# Altium PCB bdcmc25_revised.PcbDoc (part 2 of 4)
Units mm, origin at the board's own origin, x right, y up, seen from the top; angles counter-clockwise.
Board outline 177.8 x 69.85 mm, 4 copper layers (Top Layer, Layer 2 (GND), Layer 3 (GND), Bottom Layer), stack 0.603 mm thick; 363 components, 158 nets, 1074 pads, 732 vias.
Unrouted connection lines stored in the file: 6.
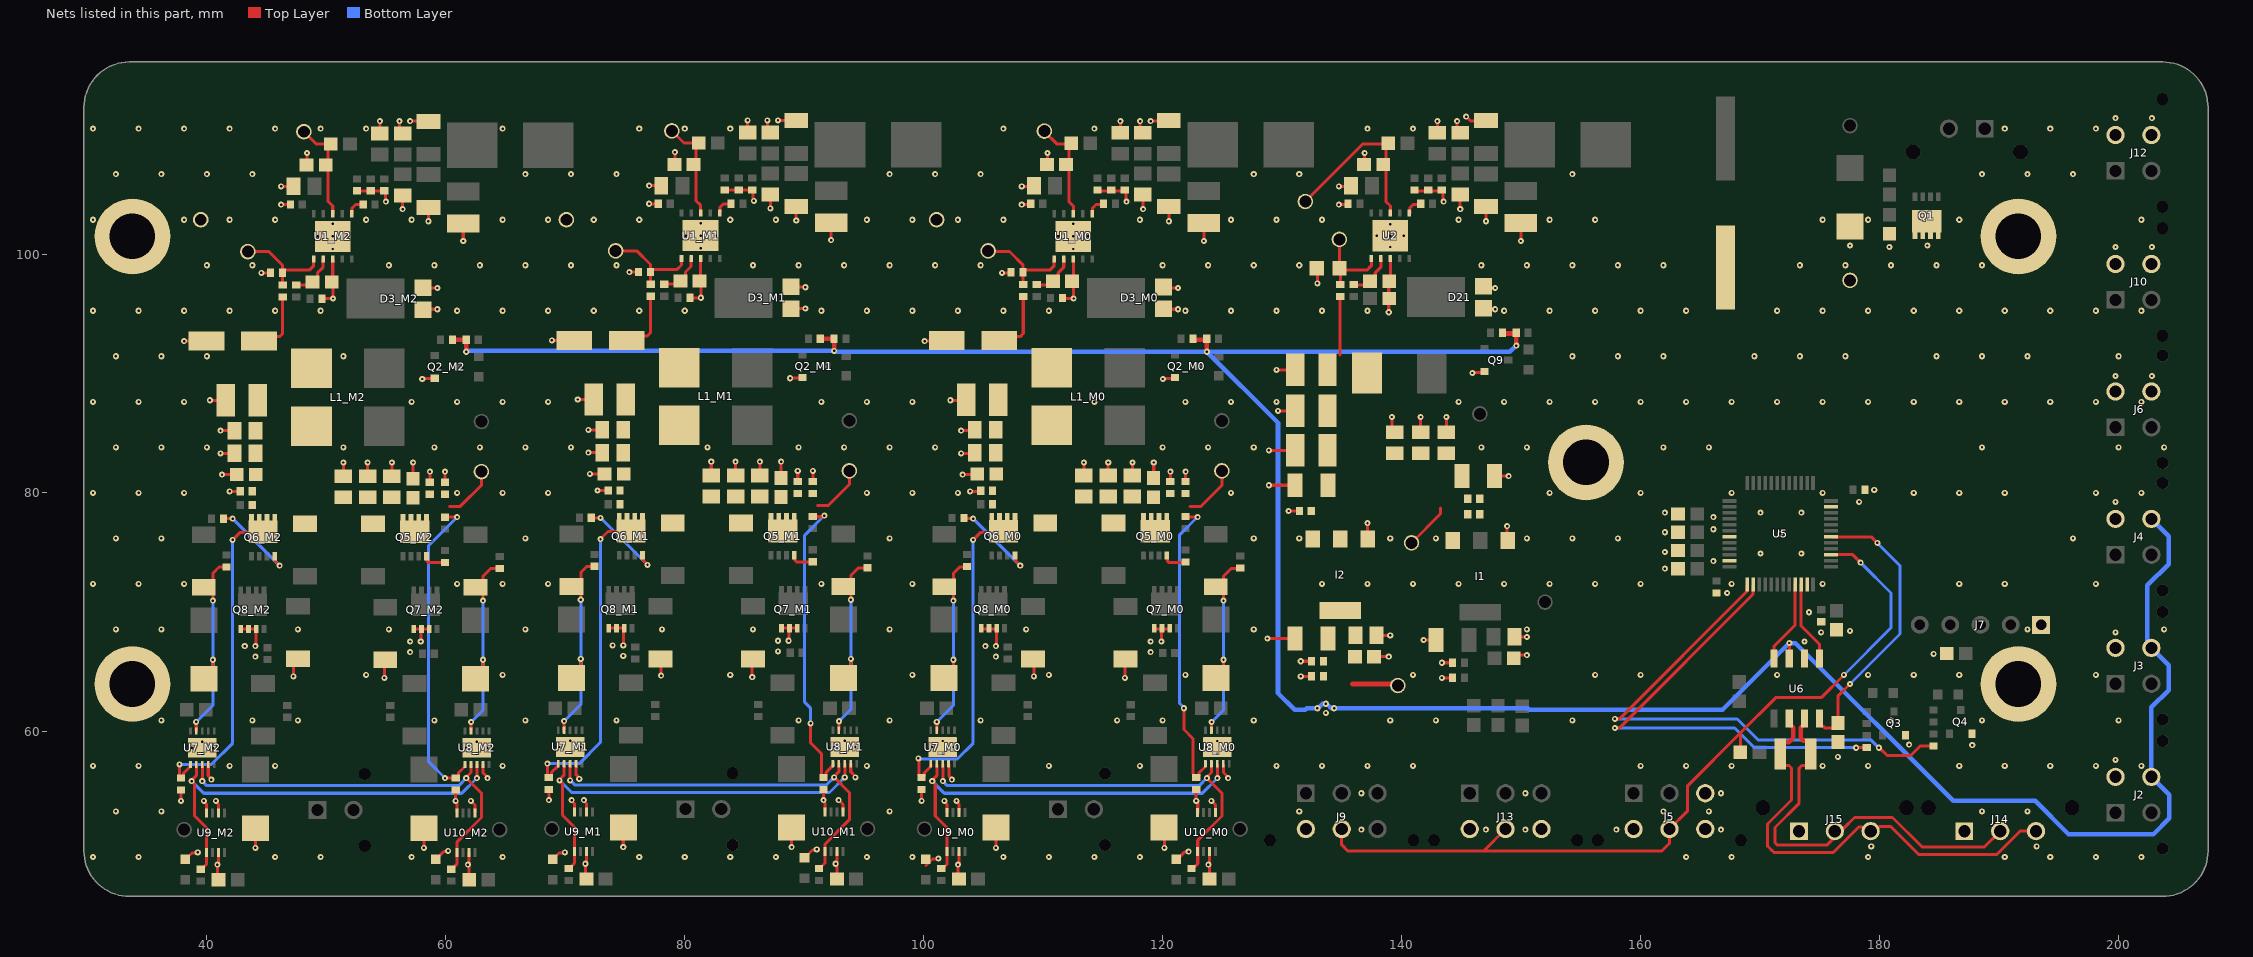
[diagram p4: the nets of this part, all layers, seen from the top]

## Part data
3V3 5V 7V 12V 12V 12V + + + - - - EN EN EN EN FB FB FB FB GND GND GND GND SW SW SW SW VBAT: library part TEST-POINT-0001, "Oranange PC Test Point, Miniature Phoisphor Bronze Silver Plating Through Hole Mounting Type"
C9_M0 C9_M1 C9_M2 C16_M0 C16_M1 C16_M2 C42 C45: library part CAP-10U-0002, "CAP CER 10UF 50V X7R 1210", Capacitance="10 uF", Voltage=50V, ComponentLink1Description=Datasheet, ComponentLink1URL=https://mm.digikey.com/Volume0/opasdata/d220001/medias/docus/41/CL32B106KBJNNNE_Spec.pdf, Device Class=Ceramic, Size=1210
C10_M0 C10_M1 C10_M2 C17_M0 C17_M1 C17_M2 C43 C46 C56_M0 C56_M1 C56_M2 C57_M0 C57_M1 C57_M2: library part CAP-1U-0001, "CAP CER 1UF 50V X7R 0805", Capacitance="1.0 uF", Voltage="50 V", ComponentLink2Description=Datasheet, ComponentLink2URL=https://www.yageo.com/upload/media/product/productsearch/datasheet/mlcc/UPY-GPHC_X7R_6.3V-to-250V_24.pdf, Device Class=Ceramic, Size=0805
C11_M0 C11_M1 C11_M2 C18_M0 C18_M1 C18_M2 C44 C47: library part CAP-0.1U-0002, "CAP CER 0.1UF 50V X7R 0805", Capacitance="100 nF", Voltage Rating="50 V", ComponentLink2Description=Datasheet, ComponentLink2URL=https://www.yageo.com/upload/media/product/productsearch/datasheet/mlcc/UPY-GPHC_X7R_6.3V-to-250V_24.pdf, Device Class=Ceramic, Size=0805
C12_M0 C12_M1 C12_M2 C19_M0 C19_M1 C19_M2 C66 C70: library part CAP-10N-0001, "CAP CER 10000PF 50V C0G/NP0 0805", Capacitance=10nF, Voltage=50V, ComponentLink1Description=Datasheet, ComponentLink1URL=https://search.murata.co.jp/Ceramy/image/img/A01X/G101/ENG/GRM2195C1H103JA01-01.pdf, Device Class=Ceramic, Size=0805
C13_M0 C13_M1 C13_M2 C21_M0 C21_M1 C21_M2 C68 C72: library part CAP-100P-0001, "CAP CER 100PF 50V C0G/NPO 0402", Capacitance="100 pF", Voltage=50V, ComponentLink1Description=Datasheet, ComponentLink1URL=https://www.yageo.com/upload/media/product/productsearch/datasheet/mlcc/UPY-GP_NP0_16V-to-50V_18.pdf, Device Class=Ceramic, Size=0402
C14_M0 C14_M1 C14_M2 C22_M0 C22_M1 C22_M2 C69 C73: library part CAP-10P-0001, "CAP CER 10PF 50V C0G/NPO 0402", Capacitance="10 pF", Voltage=50V, ComponentLink1Description=Datasheet, ComponentLink1URL=https://www.yageo.com/upload/media/product/productsearch/datasheet/mlcc/UPY-GP_NP0_16V-to-50V_18.pdf, Device Class=Ceramic, Size=0402
C15_M0 C15_M1 C15_M2 C20_M0 C20_M1 C20_M2 C62_M0 C62_M1 C62_M2 C63_M0 C63_M1 C63_M2 C67 C71: library part CAP-1N-0001, "CAP CER 1000PF 50V X7R 0402", Capacitance="1.0 nF", Voltage="50 V", ComponentLink2Description=Datasheet, ComponentLink2URL=http://www.yageo.com/documents/recent/UPY-GP_NP0_16V-to-50V_16.pdf, Device Class=Ceramic, Size=0402
C23_M0 C23_M1 C23_M2 C35 C36 C39 C40 C48 C49 C50 C74: library part CAP-0.1U-0001, "CAP CER 0.1UF 16V X7R 0402", Capacitance="100 nF", Voltage Rating="16 V", ComponentLink2Description=Datasheet, ComponentLink2URL=https://www.yageo.com/upload/media/product/productsearch/datasheet/mlcc/UPY-GPHC_X7R_6.3V-to-250V_24.pdf, Device Class=Ceramic, Size=0402
C24_M0 C24_M1 C24_M2 C25_M0 C25_M1 C25_M2 C75 C76: library part CAP-2.2U-0001, "CAP CER 2.2UF 100V X7R 1206", Capacitance=2.2uF, Voltage=100V, ComponentLink1Description=Datasheet, ComponentLink1URL=https://www.yageo.com/upload/media/product/productsearch/datasheet/mlcc/UPY-GPHC_X7R_6.3V-to-250V_24.pdf, Device Class=Ceramic, Size=1206
C26_M0 C26_M1 C26_M2: library part CAP-47U-0001, "CAP ALUM POLY 47UF 20% 16V SMD", Capacitance="47 uF", Voltage=16V, ComponentLink1Description=Datasheet, ComponentLink1URL=https://industrial.panasonic.com/cdbs/www-data/pdf/AAB8000/AAB8000C175.pdf, Device Class=Electrolytic
C27_M0 C27_M1 C27_M2 C79: library part CAP-2.7N-0001, "CAP CER 2700PF 50V C0G/NP0 0805", Capacitance=2.7nF, Voltage=50V, ComponentLink1Description=Datasheet, ComponentLink1URL=https://search.murata.co.jp/Ceramy/image/img/A01X/G101/ENG/GRM2165C1H272JA01-01.pdf, Device Class=Ceramic, Size=0805
C28_M0 C28_M1 C28_M2 C80: library part CAP-6.8P-0001, "CAP CER 6.8PF 100V C0G/NPO 0603", Capacitance=6.8pF, Voltage=100V, ComponentLink1Description=Datasheet, ComponentLink1URL=https://www.yageo.com/upload/media/product/productsearch/datasheet/mlcc/UPY-GPHC_X7R_6.3V-to-250V_24.pdf, Device Class=Ceramic, Size=0603
C29_M0 C29_M1 C29_M2: library part CAP-510P-0001, "CAP CER 510PF 50V C0G/NP0 0402", Capacitance="510 pF", Voltage="50 V", ComponentLink2Description=Datasheet, ComponentLink2URL=https://www.mouser.com/ProductDetail/Walsin/0402N511J500CT?qs=u16ybLDytRbq33ukPPRl4A%3D%3D&srsltid=AfmBOoq1-HCbTRqPV3GtwyI6lHLBf095DSA3Qg1Qkiix4a-obr82TmJ6, Device Class=Ceramic, Size=0402
C30 C31 C32 C33: library part CAP-10U-0004, "CAP TANT 10UF 10% 16V 1206", Capacitance="10 uF", Voltage=16V, ComponentLink1Description=Datasheet, ComponentLink1URL=https://www.lcsc.com/datasheet/lcsc_datasheet_2304140030_Vishay-Intertech-293D106X9016A2TE3_C110038.pdf, Device Class=Tantalum, Size=1206
C34 C38: library part CAP-10U-0001, "CAP CER 10UF 10V X5R 0603", Capacitance="10 uF", Voltage=10V, ComponentLink1Description=Datasheet, ComponentLink1URL=https://www.yageo.com/upload/media/product/app/datasheet/mlcc/upy-gphc_x5r_4v-to-50v.pdf, Device Class=Ceramic, Size=0603
C37 C41: library part CAP-470P-0001, "CAP CER 470PF 50V C0G/NPO 0805", Capacitance="470 pF", Voltage=50V, ComponentLink1Description=Datasheet, ComponentLink1URL=https://www.yageo.com/upload/media/product/productsearch/datasheet/mlcc/UPY-GP_NP0_16V-to-50V_18.pdf, Device Class=Ceramic, Size=0805
C51: library part CAP-4.7U-0001, "CAP CER 4.7UF 25V X5R 0603", Capacitance="4.7 uF", Voltage=25V, Device Class=Ceramic, Size=0603
C52 C54 C58_M0 C58_M1 C58_M2 C59_M0 C59_M1 C59_M2: library part CAP-10N-0002, "CAP CER 10000PF 50V X7R 0603", Capacitance="10 nF", Voltage="50 V", ComponentLink2Description=Datasheet, ComponentLink2URL=http://www.yageo.com/documents/recent/UPY-GPHC_X7R_6.3V-to-50V_18.pdf, Device Class=Ceramic, Size=0603
C53 C55: library part CAP-1U-0002, "CAP CER 1UF 16V X7R 0603", Capacitance="1.0 uF", Voltage=16V, Device Class=Ceramic, Size=0603
C60_M0 C60_M1 C60_M2 C61_M0 C61_M1 C61_M2 C64_M0 C64_M1 C64_M2 C65_M0 C65_M1 C65_M2 C82: library part CAP-100N-0001, "CAP CER 0.1UF 100V X7R 0603", Capacitance="100 nF", Voltage="100 V", ComponentLink1Description=Datasheet, ComponentLink1URL=https://www.yageo.com/upload/media/product/app/datasheet/mlcc/upy-np0x7r_mv_100-to-630v.pdf, Device Class=Ceramic, Size=0603
C77 C78: library part CAP-47U-0003, "CAP CER 47UF 16V X5R 1210", Capacitance="47 uF", Voltage=16V, ComponentLink1Description=Datasheet, ComponentLink1URL=https://search.murata.co.jp/Ceramy/image/img/A01X/G101/ENG/GRM32ER61C476KE15-01.pdf, Device Class=Ceramic, Size=1210
C81: library part CAP-3N-0001, "3000 pF ±5% 50V Ceramic Capacitor C0G, NP0 0603 (1608 Metric)", Capacitance="3 nF", Voltage=50V, ComponentLink1Description=Datasheet, ComponentLink1URL=https://mm.digikey.com/Volume0/opasdata/d220001/medias/docus/41/CL32B106KBJNNNE_Spec.pdf, Device Class=Ceramic, Size=1210
D1: library part DIO-TVS-0001, "TVS DIODE 40VWM 64.5VC DO214AA", Current Rating=9.3A, Voltage Rating=64.5V, ComponentLink1Description=Datasheet, ComponentLink1URL=https://www.littelfuse.com/media?resourcetype=datasheets&itemid=09a6ae9a-73cb-4ac4-acac-e6dab92ab953&filename=littelfuse_tvs_diode_smbj_datasheet.pdf
D2_M0 D2_M1 D2_M2 D4 D5 D18_M0 D18_M1 D18_M2 D19_M0 D19_M1 D19_M2 D20: library part LED-0001, "LED YELLOW CLEAR 0603 SMD", Forward Current=30mA, Forward Voltage=2V, ComponentLink1Description=Datasheet, ComponentLink1URL=https://www.americanbrightled.com/pdffiles/led-components/smt/BL-HKC36G-AV-TRB.pdf
D3_M0 D3_M1 D3_M2 D21: library part DIO-SCHOTTKY-0001, "DIODE SCHOTTKY 60V 7A POWERDI5", Forward Current=7A, Reverse Voltage (DC)=60V, ComponentLink1Description=Datasheet, ComponentLink1URL=https://www.diodes.com/assets/Datasheets/PDS760.pdf
D6_M0 D6_M1 D6_M2 D7_M0 D7_M1 D7_M2 D8_M0 D8_M1 D8_M2 D9_M0 D9_M1 D9_M2 D10_M0 D10_M1 D10_M2 D11_M0 D11_M1 D11_M2 D16_M0 D16_M1 D16_M2 D17_M0 D17_M1 D17_M2: library part DIO-SCHOTTKY-0003, "DIODE SCHOTTKY 60V 3A SOD128", Current Rating=3A, Reverse Voltage=60V, ComponentLink1Description=Datasheet, ComponentLink1URL=https://assets.nexperia.com/documents/data-sheet/PMEG6030EP.pdf
D12_M0 D12_M1 D12_M2 D13_M0 D13_M1 D13_M2 D14_M0 D14_M1 D14_M2 D15_M0 D15_M1 D15_M2: library part DIO-TVS-0002, "TVS DIODE 12VWM 19.9VC DO214AA", Current Rating=30.2A, Standoff Voltage=12V, ComponentLink1Description=Datasheet, ComponentLink1URL=https://www.littelfuse.com/media?resourcetype=datasheets&itemid=09a6ae9a-73cb-4ac4-acac-e6dab92ab953&filename=littelfuse_tvs_diode_smbj_datasheet.pdf
F1_M0 F1_M1 F1_M2 F5: library part FUSE-0001, "FUSE BLOK CARTRIDGE 125V 10A SMD", Fuse Current=8A, Voltage Rating=125V, ComponentLink2Description=Datasheet, ComponentLink2URL=https://www.littelfuse.com/~/media/electronics/datasheets/fuses/littelfuse_fuse_154_154t_154l_154tl_datasheet.pdf.pdf
F2 F3 F4: library part FUSE-0002, "FUSE BRD MT 250MA 32VAC 32VDC", Fuse Current=250mA, Voltage Rating=32V, ComponentLink2Description=Datasheet, ComponentLink2URL=https://www.littelfuse.com/media?resourcetype=datasheets&itemid=4a59f034-1cca-460e-a5ba-e1e66247c76d&filename=littelfuse_fuse_467_datasheet.pdf
I1: library part IC_LDO_3V3_0001, "IC REG LIN 3.3V 800MA SOT223-4", ComponentLink1Description="New link", ComponentLink1URL=https://www.ti.com/lit/ds/symlink/lm1117.pdf?HQS=dis-dk-null-digikeymode-dsf-pf-null-wwe&ts=1721700739746
I2: library part IC_LDO_5V_0001, "IC REG LINEAR 5V 800MA SOT223-4", ComponentLink1Description=Datasheet, ComponentLink1URL=https://www.ti.com/lit/ds/symlink/lm1117.pdf?HQS=dis-dk-null-digikeymode-dsf-pf-null-wwe&ts=1721700739746
J1: library part CONN-2POS-0002, "CONN HEADER VERT 2POS 3MM", ComponentLink1Description=Datasheet, ComponentLink1URL=https://www.molex.com/content/dam/molex/molex-dot-com/products/automated/en-us/salesdrawingpdf/436/43650/436500215_sd.pdf?inline
J2 J3 J4 J6 J10 J12: library part CONN-4POS-0002, "CONN HEADER VERT 4POS 3MM", ComponentLink1Description=Datasheet, ComponentLink1URL=https://www.molex.com/content/dam/molex/molex-dot-com/products/automated/en-us/salesdrawingpdf/430/43045/430450412_sd.pdf?inline
J5 J9 J13: library part CONN-6POS-0001, "CONN HEADER VERT 6POS 3MM", ComponentLink1Description=Datasheet, ComponentLink1URL=https://tools.molex.com/pdm_docs/ps/PS-43045.pdf
J7: "Header, 5-Pin", LatestRevisionDate=17-Jul-2002, LatestRevisionNote="Re-released for DXP Platform.", Publisher="Altium Limited"
J14 J15: library part "Micro-Fit Molex 3 Pin Vertical", Package=43650-0315, DeviceName=43650-0315, DeviceSetName=HEADER_POS3_?, GateName_1=G$1, LibraryName=con-molex-micro-fit-3_0_2, SymbolName_1=HEADER_POS3
J14_M0 J14_M1 J14_M2: library part CONN-2POS-0001, "CONN HEADER VERT 2POS", ComponentLink1Description=Datasheet, ComponentLink1URL=https://tools.molex.com/pdm_docs/ps/PS-43045.pdf
L1_M0 L1_M1 L1_M2: library part IND-15U-0002-NoJLC, "SMD MOLDING POWER CHOKE", Current Rating=6A, Inductance=15uH, ComponentLink1Description=Datasheet, ComponentLink1URL=https://www.digikey.com/en/products/detail/codaca/CSAD1010-150M/16633512?s=N4IgjCBcoBwAxVAYygMwIYBsDOBTANCAPZQDaIALHAExwDMEAuoQA4AuUIAymwE4CWAOwDmIAL6Ew1MAE5EIFJAw4CxMiGoy6AdmoUQhajGqa6BjTDp6zhywFY4c23UtOLFbVXPVtYK3e9dODsbdwA2OxgQZhB2Th4BEXFJTQhoBTQsPEISSHITS0do1g5Ibj4hUQkNOBhteTiygFVBfjYAeVQAWVx0bABXXlxzfs4AVoAJcwBbIU4wAMJp9AAPeYDq2hgo9MaQFrbOnr7B4cJRsoBBGbmyuwA6DcIAWmp5RT5%2B1VzyAMYxAFAA
L2: library part IND-8.2U-0001, "8.2 µH Shielded Molded Inductor 4 A 68mOhm Max Nonstandard", Current Rating=7.5A, Inductance=8.2uH, ComponentLink1Description=Datasheet, ComponentLink1URL=https://products.sumida.com/products/pdf/CDRH104.pdf
Q1: library part NMOS-60A-0001, "MOSFET N-CH 60V 12A/60A 8VSON", Continuous Current=60A, Voltage=60V, ComponentLink2Description=Datasheet, ComponentLink2URL=http://www.ti.com/lit/ds/symlink/csd18543q3a.pdf
Q2_M0 Q2_M1 Q2_M2 Q3 Q4 Q9: library part NMOS-200MA-0001, "MOSFET N-CH 60V 200MA SOT23", Continuous Current=200mA, Voltage=60V, ComponentLink1Description=Datasheet, ComponentLink1URL=https://toshiba.semicon-storage.com/info/T2N7002AK_datasheet_en_20150401.pdf?did=29712&prodName=T2N7002AK
Q5_M0 Q5_M1 Q5_M2 Q6_M0 Q6_M1 Q6_M2 Q7_M0 Q7_M1 Q7_M2 Q8_M0 Q8_M1 Q8_M2: library part NMOS-26A-0001, "MOSFET N-CH 30V 60A 8VSON", Continuous Current=60A, Voltage=30V, ComponentLink1Description=Datasheet, ComponentLink1URL=https://www.ti.com/lit/ds/symlink/csd17575q3.pdf?ts=1728565072242&ref_url=https%253A%252F%252Fwww.mouser.co.uk%252F
R1: library part RES-200k-0001, "RES SMD 200K OHM 1% 1/10W 0603", Power=100mW, Resistance=200k, Tolerance=1%, ComponentLink1Description=Datasheet, ComponentLink1URL=https://www.yageo.com/upload/media/product/products/datasheet/rchip/PYu-RC_Group_51_RoHS_L_12.pdf, Size=0603
R2 R6_M0 R6_M1 R6_M2 R34: library part RES-100k-0001, "RES SMD 100K OHM 1% 1/10W 0603", Power=100mW, Resistance=100k, Tolerance=1%, ComponentLink1Description=Datasheet, ComponentLink1URL=https://www.yageo.com/upload/media/product/products/datasheet/rchip/PYu-RC_Group_51_RoHS_L_12.pdf, Size=0603
R3_M0 R3_M1 R3_M2 R11: library part RES-240-0001, "240R 0.063W 1% 0402 (1005 Metric)  SMD", Power=1/16W, Resistance=240R, Tolerance=1%, ComponentLink1Description=Datasheet, ComponentLink1URL=https://www.yageo.com/upload/media/product/products/datasheet/rchip/PYu-RC_Group_51_RoHS_L_12.pdf, Size=0402
R4_M0 R4_M1 R4_M2 R12: library part RES-2.15M-0001, "RES SMD 2.15M OHM 1% 1/10W 0603", Power=1/10W, Resistance=2.15M, Tolerance=1%, ComponentLink1Description=Datasheet, ComponentLink1URL=https://www.yageo.com/upload/media/product/products/datasheet/rchip/PYu-RC_Group_51_RoHS_L_12.pdf, Size=0603
R5_M0 R5_M1 R5_M2 R13: library part RES-1k-0001, "RES 1K OHM 1% 1/16W 0402", Power=1/16W, Resistance=1k, Tolerance=1%, ComponentLink1Description=Datasheet, ComponentLink1URL=https://www.yageo.com/upload/media/product/products/datasheet/rchip/PYu-RC_Group_51_RoHS_L_12.pdf, Size=0402
R7_M0 R7_M1 R7_M2: library part RES-147k-0001, "RES 147K OHM 1% 1/16W 0402", Power=1/16W, Resistance=147k, Tolerance=1%, ComponentLink1Description=Datasheet, ComponentLink1URL=https://www.yageo.com/upload/media/product/products/datasheet/rchip/PYu-RC_Group_51_RoHS_L_12.pdf, Size=0402
R8_M0 R8_M1 R8_M2: library part RES-59k-0001, "RES 59K OHM 1% 1/16W 0402", Power=1/16W, Resistance=59k, Tolerance=1%, ComponentLink1Description=Datasheet, ComponentLink1URL=https://www.digikey.com/en/products/detail/yageo/RC0402FR-0759KL/2827634?s=N4IgTCBcDaIEoGEAMAWJYBicC0SDsArAJwDSAMiALoC%2BQA, Size=0402
R9_M0 R9_M1 R9_M2 R37: library part RES-178k-0001, "62.5mW Thick Film Resistors 50V ±100ppm/℃ ±1% 178kΩ 0402 Chip Resistor - Surface Mount ROHS", Power=1/16W, Resistance=178k, Tolerance=1%, ComponentLink1Description=Datasheet, ComponentLink1URL=https://www.lcsc.com/datasheet/lcsc_datasheet_2304140030_RALEC-RTT021783FTH_C102842.pdf, Size=0402
R10_M0 R10_M1 R10_M2: library part RES-10.5k-0001, "RES 10.5K OHM 1% 1/16W 0402", Power=1/16W, Resistance=10.5k, Tolerance=1%, ComponentLink1Description=Datasheet, ComponentLink1URL=https://www.yageo.com/upload/media/product/products/datasheet/rchip/PYu-RC_Group_51_RoHS_L_12.pdf, Size=0402
R14 R15 R20: library part RES-4.7k-0001, "RES 4.7K OHM 1% 1/10W 0603", Power=1/10W, Resistance=4.7k, Tolerance=1%, ComponentLink1Description=Datasheet, ComponentLink1URL=https://www.yageo.com/upload/media/product/products/datasheet/rchip/PYu-RC_Group_51_RoHS_L_12.pdf, Size=0603
R16 R17: library part RES-470-0001, "RES 470 OHM 1% 1/16W 0402", Power=1/16W, Resistance=470R, Tolerance=1%, ComponentLink1Description=Datasheet, ComponentLink1URL=https://www.yageo.com/upload/media/product/products/datasheet/rchip/PYu-RC_Group_51_RoHS_L_12.pdf, Size=0402
R18 R19 R32_M0 R32_M1 R32_M2 R33_M0 R33_M1 R33_M2: library part RES-100-0001, "RES 100 OHM 1% 1/16W 0402", Power=1/16W, Resistance=100R, Tolerance=1%, ComponentLink1Description=Datasheet, ComponentLink1URL=https://www.yageo.com/upload/media/product/products/datasheet/rchip/PYu-RC_Group_51_RoHS_L_12.pdf, Size=0402
R21: library part RES-120-0001, "RES 120 OHM 1% 1/2W 1210", Power=1/2W, Resistance=120R, Tolerance=1%, ComponentLink1Description=Datasheet, ComponentLink1URL=https://www.yageo.com/upload/media/product/products/datasheet/rchip/PYu-RC_Group_51_RoHS_L_12.pdf, Size=1210
R22_M0 R22_M1 R22_M2 R23_M0 R23_M1 R23_M2 R24_M0 R24_M1 R24_M2 R25_M0 R25_M1 R25_M2 R28_M0 R28_M1 R28_M2 R29_M0 R29_M1 R29_M2 R30_M0 R30_M1 R30_M2 R31_M0 R31_M1 R31_M2: library part RES-33-0001, "RES 33 OHM 1% 1/8W 0402", Power=1/8W, Resistance=33R, Tolerance=1%, ComponentLink1Description=Datasheet, ComponentLink1URL=https://www.yageo.com/upload/media/product/products/datasheet/rchip/PYu-RC_Group_51_RoHS_L_12.pdf, Size=0402
R26_M0 R26_M1 R26_M2 R27_M0 R27_M1 R27_M2: library part RES-1-0001, "RES SMD 1 OHM 5% 1/10W 0402", Power=1/10W, Resistance=1.0R, Tolerance=5%, ComponentLink1Description=Datasheet, ComponentLink1URL=https://api.pim.na.industrial.panasonic.com/file_stream/main/fileversion/1242, Size=0402
R35: library part RES-80.6k-0001, "80.6 kOhms ±1% 0.063W, 1/16W Chip Resistor 0402 (1005 Metric) Moisture Resistant Thick Film", Power=1/16W, Resistance=80.6k, Tolerance=1%, ComponentLink1Description=Datasheet, ComponentLink1URL=https://www.yageo.com/upload/media/product/products/datasheet/rchip/PYu-RC_Group_51_RoHS_L_12.pdf, Size=0402
R36: library part RES-36.5k-0001, "36.5 kOhms ±1% 0.063W, 1/16W Chip Resistor 0402 (1005 Metric) Moisture Resistant Thick Film", Power=1/16W, Resistance=36.5k
R38: library part RES-10.4k-0001, "10.4 kOhms ±0.1% 0.125W, 1/8W Chip Resistor 0805 (2012 Metric) Thin Film", Power=1/8W, Resistance=10.4k, Tolerance=1%, ComponentLink1Description=Datasheet, ComponentLink1URL=https://www.yageo.com/upload/media/product/products/datasheet/rchip/PYu-RC_Group_51_RoHS_L_12.pdf, Size=0402
U1_M0 U1_M1 U1_M2 U2: library part IC-BUCK-0001, "IC REG BUCK ADJ 5A 10WSON", ComponentLink1Description=Datasheet, ComponentLink1URL=https://www.ti.com/general/docs/suppproductinfo.tsp?distId=10&gotoUrl=https%3A%2F%2Fwww.ti.com%2Flit%2Fgpn%2Ftps54561
U5: library part IC-STM32G431CBT6, "IC MCU 32BIT 128KB FLASH 48LQFP", Package=48LQFP, ComponentLink1Description=Datasheet, ComponentLink1URL=https://www.st.com/resource/en/datasheet/stm32g431cb.pdf
U6: library part IC-CAN-0001, "IC TRANSCEIVER 1/1 8SOIC", ComponentLink1Description=Datasheet, ComponentLink1URL=https://www.ti.com/lit/ds/symlink/tcan1044-q1.pdf?HQS=dis-dk-null-digikeymode-dsf-pf-null-wwe&ts=1728758303289&ref_url=https%253A%252F%252Fwww.ti.com%252Fgeneral%252Fdocs%252Fsuppproductinfo.tsp%253FdistId%253D10%2526gotoUrl%253Dhttps%253A%252F%252Fwww.ti.com%252Flit%252Fgpn%252Ftcan1044-q1
U7_M0 U7_M1 U7_M2 U8_M0 U8_M1 U8_M2: library part IC-GTDR-0001, "IC GATE DRVR HALF-BRIDGE 10VSON", Package=10-VSON, ComponentLink1Description=Datasheet, ComponentLink1URL=https://www.ti.com/lit/ds/symlink/ucc27282.pdf?HQS=dis-dk-null-digikeymode-dsf-pf-null-wwe&ts=1728563165008&ref_url=https%253A%252F%252Fwww.ti.com, VCC Max=16
U9_M0 U9_M1 U9_M2 U10_M0 U10_M1 U10_M2: library part IC-MUX-0001, "Multiplexer 1 x 2:1 8-VSSOP", ComponentLink1Description=Datasheet, ComponentLink1URL=https://www.ti.com/general/docs/suppproductinfo.tsp?distId=10&gotoUrl=https%3A%2F%2Fwww.ti.com%2Flit%2Fgpn%2Fsn74lvc2g157

## Free pads (board coordinates)
  round 6.35 hole 3.81: ""(33.782,64.008) ""(33.782,101.473) ""(155.448,82.55) ""(191.643,64.008) ""(191.643,101.473)

## Via types
v1: diameter 0.508, hole 0.203, Top Layer to Bottom Layer, 717 vias
v2: diameter 0.508, hole 0.2, Top Layer to Bottom Layer, 15 vias

## Nets (pads, with @x,y where several pads share a name; then routed paths per layer and width w, separated by ;. In a path a pad name is that pad's centre, name@x,y a point inside that pad or via, vN(x,y) a via of type N, cw(c..) or ccw(c..) an arc to the next point about the centre after c; other vN are vias at no path point)
3V3: 
5V: 5V.1 C33.2 C34.2 C35.2 C36.2 C37.2 I2.2 I2.4 J2.4 J3.4 J4.4 R3_M0.2 R3_M1.2 R3_M2.2 R5_M0.2 R5_M1.2 R5_M2.2 R11.2 R13.2 U6.3 | length 246.5
  Top Layer w0.254: U6.3@172.466,66.127 v1(172.466,67.437)
  Top Layer w0.381: R5_M2.2@60.563,92.837 R3_M2.2@61.722,92.837 v1(61.722,91.821) ; R5_M1.2@91.356,92.902 R3_M1.2@92.515,92.902 v1(92.515,91.886) ; R5_M0.2@122.552,92.837 123.711,92.837 v1(123.711,91.821) ; 135.89,64.008 139.573,64.008 5V.1@139.7,63.881 ; R13.2@148.46,93.345 149.619,93.345 v1(149.619,92.329)
  Bottom Layer w0.381: v1(61.722,91.821) 61.756,91.821 61.821,91.886 v1(92.515,91.886) 92.55,91.886 92.615,91.821 v1(123.711,91.821) ; v1(149.619,92.329) 149.584,92.329 149.076,91.821 v1(123.711,91.821) ; J4.4@202.771,77.827 204.216,76.382 204.216,74.041 202.438,72.263 202.438,67.676 202.771,67.343 J3.4@202.771,67.032 204.216,65.587 204.216,63.5 202.771,62.055 202.771,61.436 202.761,61.426 202.761,58.843 202.771,58.833 J2.4@202.771,56.237 204.271,54.737 204.271,52.76 202.946,51.435 195.834,51.435 193.04,54.229 186.182,54.229 172.974,67.437 v1(172.466,67.437) 166.878,61.849 150.689,61.849 150.562,61.976 v1(134.366,61.976) 134.361,61.981 134.114,61.981 133.805,62.289 133.769,62.289 133.702,62.357 v1(133.667,62.357) 133.643,62.333 133.36,62.333 133.003,61.976 132.077,61.976 131.95,61.849 131.064,61.849 129.667,63.246 129.667,85.865 v1(123.711,91.821)
  other v1: 133.667,61.595 132.969,61.976
7V_Buck: 7V.1 C30.2 C32.2 C45.2 C46.2 C47.2 C70.2 C71.2 C72.2 C73.2 C77.2 C78.2 I1.3 I2.3 L2.2 R35.1 | length 8.8
  Top Layer w0.254: 134.874,91.567 R35.1@134.874,96.457 ; 7V.1@140.843,75.819 143.256,78.232 143.256,78.74
12V_MOTOR_M0: 12V.1@124.968,81.844 C16_M0.2 C17_M0.2 C18_M0.2 C19_M0.2 C20_M0.2 C21_M0.2 C22_M0.2 C26_M0.2 C56_M0.2 C57_M0.1 C58_M0.2 C59_M0.1 C62_M0.2 C63_M0.2 D8_M0.2 D9_M0.2 L1_M0.2 Q5_M0.3 Q6_M0.3 R7_M0.2 R26_M0.2 R27_M0.2 U7_M0.6 U8_M0.6 | length 63.6
  Top Layer w0.254: v1(99.568,57.785) 99.617,57.736 99.617,56.355 99.846,56.126 99.885,56.126 100.058,56.299 100.058,56.553 100.613,57.108 U7_M0.6@100.613,57.274 ; v1(104.153,76.073) 104.788,76.708 106.66,76.708 Q6_M0.3@106.7,76.748 ; C26_M0.2@106.353,92.71 106.729,93.086 108.085,93.086 108.344,93.345 R7_M0.2@108.344,96.401 ; v1(121.793,61.976) 121.793,60.198 122.555,59.436 122.555,56.504 122.586,56.473 122.586,56.355 122.759,56.182 C63_M0.2@122.809,56.182 ; R26_M0.2@121.92,78.026 121.944,78.002 122.912,78.002 v1(122.936,77.978) ; 122.314,78.881 123.217,78.881 124.981,80.645 12V.1@124.981,81.788 ; C63_M0.2@122.872,56.126 123.045,56.299 123.045,56.553 123.6,57.108 U8_M0.6@123.6,57.274
  Bottom Layer w0.254: v1(99.568,57.785) 99.608,57.745 102.843,57.745 104.153,59.055 v1(104.153,76.073) ; v1(121.793,61.976) 121.793,62.045 121.412,62.426 121.412,76.454 v1(122.936,77.978)
12V_MOTOR_M1: 12V.1@93.785,81.853 C16_M1.2 C17_M1.2 C18_M1.2 C19_M1.2 C20_M1.2 C21_M1.2 C22_M1.2 C26_M1.2 C56_M1.2 C57_M1.1 C58_M1.2 C59_M1.1 C62_M1.2 C63_M1.2 D8_M1.2 D9_M1.2 L1_M1.2 Q5_M1.3 Q6_M1.3 R7_M1.2 R26_M1.2 R27_M1.2 U7_M1.6 U8_M1.6 | length 63.4
  Top Layer w0.254: v1(68.512,57.342) 68.512,56.318 C62_M1.2@68.639,56.191 68.689,56.191 68.862,56.364 68.862,56.618 69.417,57.173 U7_M1.6@69.417,57.339 ; v1(72.957,76.138) 73.592,76.773 75.464,76.773 Q6_M1.3@75.504,76.813 ; C26_M1.2@75.157,92.775 75.533,93.151 76.889,93.151 77.148,93.41 R7_M1.2@77.148,96.466 ; v1(90.551,60.706) 90.551,59.073 91.44,58.184 91.44,56.364 91.613,56.191 91.676,56.191 91.849,56.364 91.849,56.618 92.404,57.173 U8_M1.6@92.404,57.339 ; R26_M1.2@90.737,78.035 90.766,78.007 91.527,78.007 91.625,78.105 v1(91.694,78.105) ; 91.118,78.946 92.021,78.946 93.785,80.71 12V.1@93.785,81.853
  Bottom Layer w0.254: v1(68.512,57.342) 71.179,57.342 72.957,59.12 v1(72.957,76.138) ; v1(90.551,60.706) 90.551,61.976 90.043,62.484 90.043,76.454 v1(91.694,78.105)
12V_MOTOR_M2: 12V.1@62.992,81.788 C16_M2.2 C17_M2.2 C18_M2.2 C19_M2.2 C20_M2.2 C21_M2.2 C22_M2.2 C26_M2.2 C56_M2.2 C57_M2.1 C58_M2.2 C59_M2.1 C62_M2.2 C63_M2.2 D8_M2.2 D9_M2.2 L1_M2.2 Q5_M2.3 Q6_M2.3 R7_M2.2 R26_M2.2 R27_M2.2 U7_M2.6 U8_M2.6 | length 64.4
  Top Layer w0.254: v1(37.719,57.277) 37.719,56.253 C62_M2.2@37.846,56.126 37.896,56.126 38.069,56.299 38.069,56.553 38.624,57.108 U7_M2.6@38.624,57.274 ; v1(42.164,76.073) 42.799,76.708 44.671,76.708 Q6_M2.3@44.711,76.748 ; C26_M2.2@44.364,92.71 44.74,93.086 46.096,93.086 46.355,93.345 R7_M2.2@46.355,96.401 ; v1(59.944,56.134) 59.948,56.13 60.829,56.13 C63_M2.2@60.833,56.126 60.883,56.126 61.056,56.299 61.056,56.553 61.611,57.108 U8_M2.6@61.611,57.274 ; R26_M2.2@59.944,77.97 59.948,77.974 60.956,77.974 v1(60.96,77.978) ; 60.325,78.881 61.228,78.881 62.992,80.645 12V.1@62.992,81.788
  Bottom Layer w0.254: v1(37.719,57.277) 40.386,57.277 42.164,59.055 v1(42.164,76.073) ; v1(59.944,56.134) 58.547,57.531 58.547,75.565 v1(60.96,77.978)
BOOT_2: C74.1 U2.1 | length 1.5
  Top Layer w0.254: U2.1@140.678,103.373 140.701,103.396 140.701,103.858 140.983,104.14 C74.1@141.626,104.14
BOOT_M0: C23_M0.1 U1_M0.1 | length 1.5
  Top Layer w0.254: U1_M0.1@114.135,103.373 114.158,103.396 114.158,103.858 114.44,104.14 C23_M0.1@115.083,104.14
BOOT_M1: C23_M1.1 U1_M1.1 | length 1.5
  Top Layer w0.254: U1_M1.1@82.939,103.438 82.962,103.461 82.962,103.923 83.244,104.205 C23_M1.1@83.887,104.205
BOOT_M2: C23_M2.1 U1_M2.1 | length 1.5
  Top Layer w0.254: U1_M2.1@52.146,103.373 52.169,103.396 52.169,103.858 52.451,104.14 C23_M2.1@53.094,104.14
CAN_N: J14.P$3 J15.P$3 R21.2 U6.6 | length 38.7
  Top Layer w0.254: R21.2@171.699,58.166 171.699,57.475 171.984,57.191 172.433,57.191 172.656,56.967 172.656,54.292 170.815,52.451 170.629,52.265 170.629,50.469 170.815,50.283 171.001,50.097 171.187,49.911 176.149,49.911 178.279,52.041 178.579,52.041 178.931,51.689 179.621,51.689 180.002,52.07 180.975,52.07 183.134,49.911 183.32,49.725 189.806,49.725 191.77,51.689 J14.P$3@193.119,51.689
  Top Layer w0.381: R21.2@171.699,58.166 171.699,58.857 171.984,59.141 172.433,59.141 172.784,59.492 172.784,60.359 172.466,60.677 U6.6@172.466,61.127
CAN_P: J14.P$2 J15.P$2 R21.1 U6.7 | length 34.3
  Top Layer w0.254: R21.1@174.249,58.166 174.249,57.475 173.965,57.191 173.515,57.191 173.291,56.968 173.291,54.029 171.264,52.002 171.264,50.732 171.45,50.546 175.641,50.546 176.056,50.961 176.056,51.469 176.52,51.933 177.028,51.933 177.927,52.832 181.111,52.832 183.583,50.36 188.79,50.36 J14.P$2@190.119,51.689
  Top Layer w0.381: U6.7@173.736,61.127 173.736,60.677 173.418,60.359 173.418,59.491 173.642,59.268 173.965,59.268 174.249,58.984 R21.1@174.249,58.166
CAN_RX_LED: R17.2 U5.25 | length 44.3
  Top Layer w0.254: v1(157.861,61.087) 157.885,61.111 158.266,61.111 168.929,71.774 168.929,72.306 U5.25@168.954,72.331 ; v1(179.959,58.674) 180,58.674 180.635,58.039 182.644,58.039 183.41,58.805 184.527,58.805 R17.2@184.531,58.809
  Bottom Layer w0.254: v1(157.861,61.087) 168.106,61.087 169.884,59.309 179.324,59.309 v1(179.959,58.674)
CAN_STB: R20.1 U5.42 U6.8 | length 24.4
  Top Layer w0.254: U6.8@175.006,61.127 175.006,60.677 175.179,60.504 175.254,60.504 175.433,60.325 176.111,60.325 R20.1@176.53,60.744 176.53,62.992 v1(177.546,64.008) ; U5.42@175.956,76.329 U5.42@175.954,76.331 179.32,76.331 v1(179.832,75.819)
  Bottom Layer w0.254: v1(177.546,64.008) 181.737,68.199 181.737,73.914 v1(179.832,75.819)
CAN_TX_LED: R16.2 U5.26 | length 38.8
  Top Layer w0.254: v1(157.861,60.325) 157.89,60.354 158.271,60.354 169.429,71.512 169.429,72.306 U5.26@169.454,72.331 ; v1(178.054,58.674) 178.058,58.678 178.939,58.678 R16.2@178.943,58.682
  Bottom Layer w0.254: v1(157.861,60.325) 167.894,60.325 169.545,58.674 v1(178.054,58.674)
COMP_2: C80.2 R36.2 U2.7 | length 3.7
  Top Layer w0.254: R36.2@136.03,97.401 136.038,97.409 137.135,97.409 137.389,97.663 137.808,98.082 137.808,98.425 138.278,98.895 U2.7@138.278,99.573
COMP_M0: C28_M0.2 R8_M0.2 U1_M0.7 | length 3.7
  Top Layer w0.254: R8_M0.2@109.487,97.401 109.495,97.409 110.592,97.409 110.846,97.663 111.265,98.082 111.265,98.425 111.735,98.895 U1_M0.7@111.735,99.573
COMP_M1: C28_M1.2 R8_M1.2 U1_M1.7 | length 3.7
  Top Layer w0.254: R8_M1.2@78.291,97.466 78.299,97.474 79.396,97.474 C28_M1.2@79.65,97.728 80.069,98.147 80.069,98.49 80.539,98.96 U1_M1.7@80.539,99.638
COMP_M2: C28_M2.2 R8_M2.2 U1_M2.7 | length 3.7
  Top Layer w0.254: R8_M2.2@47.498,97.401 47.506,97.409 48.603,97.409 C28_M2.2@48.857,97.663 49.276,98.082 49.276,98.425 49.746,98.895 U1_M2.7@49.746,99.573
DIR_1_IN_M0: R32_M0.1 U7_M0.7 U8_M0.8 U9_M0.5 | length 35.6
  Top Layer w0.254: U7_M0.7@101.113,57.274 101.113,56.338 100.724,55.949 v1(100.724,55.88) 100.724,55.858 100.978,55.604 100.978,52.959 101.98,51.957 101.98,49.915 101.978,49.913 101.978,48.948 101.536,48.506 R32_M0.1@101.486,48.506 ; v1(124.6,56.134) U8_M0.8@124.6,57.274
  Bottom Layer w0.254: v1(100.724,55.88) 101.74,54.864 123.33,54.864 v1(124.6,56.134)
DIR_1_IN_M1: R32_M1.1 U7_M1.7 U8_M1.8 U9_M1.5 | length 35.6
  Top Layer w0.254: U7_M1.7@69.917,57.339 69.917,56.403 69.528,56.014 v1(69.528,55.945) 69.528,55.923 69.782,55.669 69.782,53.024 70.784,52.022 70.784,49.98 U9_M1.5@70.782,49.978 70.782,49.013 70.34,48.571 R32_M1.1@70.29,48.571 ; v1(93.404,56.199) U8_M1.8@93.404,57.339
  Bottom Layer w0.254: v1(69.528,55.945) 70.544,54.929 92.134,54.929 v1(93.404,56.199)
DIR_1_IN_M2: R32_M2.1 U7_M2.7 U8_M2.8 U9_M2.5 | length 35.6
  Top Layer w0.254: U7_M2.7@39.124,57.274 39.124,56.338 38.735,55.949 v1(38.735,55.88) 38.735,55.858 38.989,55.604 38.989,52.959 39.991,51.957 39.991,49.915 U9_M2.5@39.989,49.913 39.989,48.948 39.547,48.506 R32_M2.1@39.497,48.506 ; v1(62.611,56.134) U8_M2.8@62.611,57.274
  Bottom Layer w0.254: v1(38.735,55.88) 39.751,54.864 61.341,54.864 v1(62.611,56.134)
DIR_2_IN_M0: R33_M0.1 U7_M0.8 U8_M0.7 U10_M0.5 | length 34.4
  Top Layer w0.254: v1(101.613,55.88) U7_M0.8@101.613,57.274 ; R33_M0.1@122.441,48.506 122.491,48.506 122.949,48.964 122.949,49.969 122.949,50.919 124.981,52.951 124.981,54.864 v1(123.711,56.134) 123.711,56.203 124.1,56.592 U8_M0.7@124.1,57.274
  Bottom Layer w0.254: v1(101.613,55.88) 101.994,55.499 123.076,55.499 v1(123.711,56.134)
DIR_2_IN_M1: R33_M1.1 U7_M1.8 U8_M1.7 U10_M1.5 | length 34.4
  Top Layer w0.254: v1(70.417,55.945) U7_M1.8@70.417,57.339 ; R33_M1.1@91.245,48.571 91.295,48.571 91.753,49.029 91.753,50.605 93.785,52.637 93.785,54.929 v1(92.515,56.199) 92.515,56.268 92.904,56.657 U8_M1.7@92.904,57.339
  Bottom Layer w0.254: v1(70.417,55.945) 70.798,55.564 91.88,55.564 v1(92.515,56.199)
DIR_2_IN_M2: R33_M2.1 U7_M2.8 U8_M2.7 U10_M2.5 | length 34.4
  Top Layer w0.254: v1(39.624,55.88) U7_M2.8@39.624,57.274 ; R33_M2.1@60.452,48.506 60.502,48.506 60.96,48.964 U10_M2.5@60.96,49.913 60.96,50.8 62.992,52.832 62.992,54.864 v1(61.722,56.134) 61.722,56.203 62.111,56.592 U8_M2.7@62.111,57.274
  Bottom Layer w0.254: v1(39.624,55.88) 40.005,55.499 61.087,55.499 v1(61.722,56.134)
EN_2: EN.1@131.953,104.394 R12.1 R34.2 U2.3 | length 15.2
  Top Layer w0.254: EN.1@131.953,104.394 136.779,109.22 138.904,109.22 138.697,109.013 138.697,107.658 138.481,107.442 138.697,107.226 138.697,104.394 139.078,104.013 U2.3@139.078,103.373
EN_M0: EN.1@110.109,110.292 R4_M0.1 R6_M0.2 U1_M0.3 | length 8.9
  Top Layer w0.254: EN.1@110.122,110.236 111.138,109.22 R4_M0.1@112.361,109.22 ; R4_M0.1@112.37,109.22 R4_M0.1@112.361,109.22 ; U1_M0.3@112.535,103.373 112.535,104.013 112.154,104.394 112.154,107.226 111.938,107.442 112.154,107.658 112.154,109.013 R4_M0.1@112.361,109.22
EN_M1: EN.1@78.926,110.301 R4_M1.1 R6_M1.2 U1_M1.3 | length 8.9
  Top Layer w0.254: EN.1@78.926,110.301 79.942,109.285 R4_M1.1@81.165,109.285 ; R4_M1.1@81.174,109.285 R4_M1.1@81.165,109.285 ; U1_M1.3@81.339,103.438 81.339,104.078 80.958,104.459 80.958,107.291 R6_M1.2@80.742,107.507 80.958,107.723 80.958,109.078 R4_M1.1@81.165,109.285
EN_M2: EN.1@48.133,110.236 R4_M2.1 R6_M2.2 U1_M2.3 | length 8.9
  Top Layer w0.254: EN.1@48.133,110.236 49.149,109.22 R4_M2.1@50.372,109.22 ; R4_M2.1@50.381,109.22 R4_M2.1@50.372,109.22 ; U1_M2.3@50.546,103.373 50.546,104.013 50.165,104.394 50.165,107.226 R6_M2.2@49.949,107.442 50.165,107.658 50.165,109.013 R4_M2.1@50.372,109.22
FB_2: FB.1@134.808,101.219 R35.2 R38.1 U2.6 | length 7.2
  Top Layer w0.254: R38.1@134.808,98.806 FB.1@134.808,101.219 ; R38.1@134.879,98.806 R38.1@134.879,98.475 ; R35.2@134.887,97.401 134.883,97.405 134.883,98.421 134.879,98.425 R38.1@134.879,98.475 ; U2.6@137.478,99.573 137.478,99.017 137.108,98.648 135.052,98.648 R38.1@134.879,98.475
FB_M0: FB.1@105.41,100.259 R7_M0.1 R10_M0.2 U1_M0.6 | length 8.4
  Top Layer w0.254: FB.1@105.423,100.203 107.185,100.203 108.336,99.052 R10_M0.2@108.336,98.475 ; R7_M0.1@108.344,97.401 108.34,97.405 108.34,98.421 108.336,98.425 R10_M0.2@108.336,98.475 ; U1_M0.6@110.935,99.573 110.935,99.017 110.565,98.648 108.509,98.648 R10_M0.2@108.336,98.475
FB_M1: FB.1@74.227,100.268 R7_M1.1 R10_M1.2 U1_M1.6 | length 8.4
  Top Layer w0.254: FB.1@74.227,100.268 75.989,100.268 77.14,99.117 R10_M1.2@77.14,98.54 ; R7_M1.1@77.148,97.466 77.144,97.47 77.144,98.486 R10_M1.2@77.14,98.49 R10_M1.2@77.14,98.54 ; U1_M1.6@79.739,99.638 79.739,99.082 79.37,98.713 77.313,98.713 R10_M1.2@77.14,98.54
FB_M2: FB.1@43.434,100.203 R7_M2.1 R10_M2.2 U1_M2.6 | length 8.4
  Top Layer w0.254: FB.1@43.434,100.203 45.196,100.203 46.347,99.052 R10_M2.2@46.347,98.475 ; R7_M2.1@46.355,97.401 46.351,97.405 46.351,98.421 R10_M2.2@46.347,98.425 R10_M2.2@46.347,98.475 ; U1_M2.6@48.946,99.573 48.946,99.017 48.577,98.648 46.52,98.648 R10_M2.2@46.347,98.475
FDCAN_RX: U5.33 U6.4 | length 6.9
  Top Layer w0.254: U6.4@171.196,66.127 171.196,67.183 172.954,68.941 U5.33@172.954,72.331
FDCAN_TX: U5.34 U6.1 | length 6.8
  Top Layer w0.254: U5.34@173.454,72.331 173.454,68.862 175.006,67.31 U6.1@175.006,66.127
GND: C1.2 C9_M0.1 C9_M1.1 C9_M2.1 C10_M0.1 C10_M1.1 C10_M2.1 C11_M0.1 C11_M1.1 C11_M2.1 C12_M0.1 C12_M1.1 C12_M2.1 C13_M0.1 C13_M1.1 C13_M2.1 C14_M0.1 C14_M1.1 C14_M2.1 C15_M0.1 C15_M1.1 C15_M2.1 C16_M0.1 C16_M1.1 C16_M2.1 C17_M0.1 C17_M1.1 C17_M2.1 C18_M0.1 C18_M1.1 C18_M2.1 C19_M0.1 C19_M1.1 C19_M2.1 C20_M0.1 C20_M1.1 C20_M2.1 C21_M0.1 C21_M1.1 C21_M2.1 C22_M0.1 C22_M1.1 C22_M2.1 C24_M0.1 C24_M1.1 C24_M2.1 C25_M0.1 C25_M1.1 C25_M2.1 C26_M0.1 C26_M1.1 C26_M2.1 C27_M0.1 C27_M1.1 C27_M2.1 C28_M0.1 C28_M1.1 C28_M2.1 C29_M0.1 C29_M1.1 C29_M2.1 C30.1 C31.1 C32.1 C33.1 C34.1 C35.1 C36.1 C37.1 C38.1 C39.1 C40.1 C41.1 C42.1 C43.1 C44.1 C45.1 C46.1 C47.1 C48.1 C49.1 C50.1 C51.1 C52.1 C53.1 C54.1 C55.1 C56_M0.1 C56_M1.1 C56_M2.1 C57_M0.2 C57_M1.2 C57_M2.2 C58_M0.1 C58_M1.1 C58_M2.1 C59_M0.2 C59_M1.2 C59_M2.2 C62_M0.1 C62_M1.1 C62_M2.1 C63_M0.1 C63_M1.1 C63_M2.1 C64_M0.2 C64_M1.2 C64_M2.2 C65_M0.2 C65_M1.2 C65_M2.2 C66.1 C67.1 C68.1 C69.1 C70.1 C71.1 C72.1 C73.1 C75.1 C76.1 C77.1 C78.1 C79.1 C80.1 C81.2 C82.1 D1.2 D3_M0.1 D3_M1.1 D3_M2.1 D12_M0.1 D12_M1.1 D12_M2.1 D15_M0.1 D15_M1.1 D15_M2.1 D16_M0.1 D16_M1.1 D16_M2.1 D17_M0.1 D17_M1.1 D17_M2.1 D18_M0.2 D18_M1.2 D18_M2.2 D19_M0.2 D19_M1.2 D19_M2.2 D21.1 GND.1 I1.1 I2.1 J2.2 J3.2 J4.2 J5.3 J5.4 J5.6 J6.2 J6.4 J7.1 J9.4 J10.2 J10.4 J12.2 J12.4 J13.4 J13.6 J14.P$1 J15.P$1 pad. Q1.3 Q2_M0.2 Q2_M1.2 Q2_M2.2 Q3.2 Q4.2 Q7_M0.2 Q7_M1.2 Q7_M2.2 Q8_M0.2 Q8_M1.2 Q8_M2.2 Q9.2 R2.2 R6_M0.1 R6_M1.1 R6_M2.1 R9_M0.1 R9_M1.1 R9_M2.1 R10_M0.1 R10_M1.1 R10_M2.1 R20.2 R34.1 R37.1 R38.2 U1_M0.8 U1_M0.11 U1_M1.8 U1_M1.11 U1_M2.8 U1_M2.11 U2.8 U2.11 U5.19 U5.23 U5.35 U5.47 U6.2 U7_M0.9 U7_M0.11 U7_M1.9 U7_M1.11 U7_M2.9 U7_M2.11 U8_M0.9 U8_M0.11 U8_M1.9 U8_M1.11 U8_M2.9 U8_M2.11 U9_M0.2 U9_M0.4 U9_M0.7 U9_M1.2 U9_M1.4 U9_M1.7 U9_M2.2 U9_M2.4 U9_M2.7 U10_M0.1 U10_M0.4 U10_M0.7 U10_M1.1 U10_M1.4 U10_M1.7 U10_M2.1 U10_M2.4 U10_M2.7 | length 243.4
  Top Layer w0.254: v1(37.846,54.229) C62_M2.1@37.846,55.126 ; v1(38.1,92.71) C26_M2.1@39.964,92.71 ; D18_M2.2@38.216,49.322 38.757,49.862 39.194,49.862 v1(39.243,49.911) ; v1(39.751,54.229) 39.751,54.16 39.987,53.924 39.987,53.215 U9_M2.4@39.989,53.213 ; U7_M2.9@40.124,57.274 40.124,56.338 40.386,56.076 v1(40.386,56.007) ; v1(40.259,87.757) C16_M2.1@41.594,87.757 ; v1(40.767,54.229) 40.767,54.16 40.987,53.94 40.987,53.215 U9_M2.2@40.989,53.213 ; C64_M2.2@40.894,47.631 v1(40.894,48.895) ; v1@40.894,48.8 40.989,48.895 U9_M2.7@40.989,49.913 ; v1(41.148,83.312) C18_M2.1@42.309,83.312 ; v1(41.148,85.217) C17_M2.1@42.309,85.217 ; v1(41.275,81.534) C58_M2.1@42.507,81.534 ; v1(41.91,80.137) C20_M2.1@42.807,80.137 ; Q8_M2.2@42.847,68.612 Q8_M2.2@43.497,68.612 Q8_M2.2@44.147,68.612 44.108,68.573 44.108,67.222 v1(44.069,67.183) ; v1(44.069,50.292) D12_M2.1@44.069,51.94 ; v1(44.577,98.425) R10_M2.1@45.347,98.425 ; v1(46.228,104.14) R9_M2.1@46.998,104.14 ; v1(46.228,105.664) C27_M2.1@47.253,105.664 ; v1(47.244,64.643) 47.244,65.745 D16_M2.1@47.625,66.126 ; R6_M2.1@48.349,107.442 48.387,107.48 v1(48.387,108.458) ; C29_M2.1@49.649,96.266 49.653,96.27 50.563,96.27 v1(50.566,96.274) 50.566,97.554 C28_M2.1@50.457,97.663 50.546,97.752 U1_M2.8@50.546,99.573 ; C57_M2.2@51.435,81.398 v1(51.435,82.55) ; C14_M2.1@52.578,105.291 C13_M2.1@53.721,105.291 C15_M2.1@54.864,105.291 54.946,105.209 54.946,104.439 v1(54.995,104.39) ; C19_M2.1@53.467,81.398 v1(53.467,82.55) ; C12_M2.1@54.483,110.1 v1(54.483,111.125) ; v1(54.864,64.516) 54.864,65.968 D17_M2.1@54.939,66.043 ; C56_M2.1@55.499,81.398 v1(55.499,82.55) ; v1(56.134,111.125) 56.134,110.354 C10_M2.1@56.388,110.1 ; v1(56.388,103.759) C11_M2.1@56.388,104.911 ; v1(57.023,111.125) 58.525,111.125 C24_M2.1@58.547,111.103 ; C59_M2.2@57.277,81.191 v1(57.277,82.55) ; Q7_M2.2@57.325,68.612 Q7_M2.2@57.975,68.612 ; v1(57.912,67.564) 57.944,67.596 57.944,68.581 Q7_M2.2@57.975,68.612 ; v1(58.039,89.535) 58.072,89.568 59.038,89.568 Q2_M2.2@59.071,89.601 ; D3_M2.1@58.101,95.346 58.132,95.377 v1(59.309,95.377) ; D3_M2.1@58.101,97.186 58.132,97.155 v1(59.309,97.155) ; v1(58.166,50.292) D15_M2.1@58.166,51.94 ; v1(58.547,102.743) C25_M2.1@58.547,103.908 ; Q7_M2.2@58.625,68.612 Q7_M2.2@57.975,68.612 ; C21_M2.1@58.674,80.891 v1(58.674,81.788) ; D19_M2.2@59.171,49.322 59.839,49.989 60.149,49.989 v1(60.198,50.038) ; C22_M2.1@59.944,80.891 v1(59.944,81.788) ; C63_M2.1@60.833,55.126 v1(60.833,54.229) 60.833,54.16 60.96,54.033 U10_M2.4@60.96,53.213 ; v1(61.468,101.092) C9_M2.1@61.468,102.545 ; v1(61.849,48.895) v1@61.96,48.784 ; C65_M2.2@61.96,47.625 61.96,48.715 61.898,48.778 61.898,48.833 61.96,48.895 U10_M2.7@61.96,49.913 ; v1(62.103,54.229) 62.46,53.872 U10_M2.1@62.46,53.213 ; U8_M2.9@63.111,57.274 63.111,56.592 63.5,56.203 v1(63.5,56.134) ; v1(68.639,54.294) C62_M1.1@68.639,55.191 ; v1(68.893,92.775) C26_M1.1@70.757,92.775 ; D18_M1.2@68.95,49.322 69.491,49.862 69.928,49.862 v1(69.977,49.911) ; v1(70.544,54.294) 70.544,54.225 70.78,53.989 70.78,53.28 U9_M1.4@70.782,53.278 ; U7_M1.9@70.917,57.339 70.917,56.403 71.179,56.141 v1(71.179,56.072) ; v1(71.052,87.822) C16_M1.1@72.387,87.822 ; v1(71.56,54.294) 71.56,54.225 71.78,54.005 71.78,53.28 U9_M1.2@71.782,53.278 ; C64_M1.2@71.687,47.696 v1(71.687,48.96) ; v1@71.687,48.865 71.782,48.96 U9_M1.7@71.782,49.978 ; v1(71.941,83.377) C18_M1.1@73.102,83.377 ; v1(71.941,85.282) C17_M1.1@73.102,85.282 ; v1(72.068,81.599) C58_M1.1@73.3,81.599 ; v1(72.703,80.202) C20_M1.1@73.6,80.202 ; Q8_M1.2@73.64,68.677 Q8_M1.2@74.29,68.677 Q8_M1.2@74.94,68.677 74.901,68.638 74.901,67.287 v1(74.862,67.248) ; v1(74.862,50.357) D12_M1.1@74.862,52.005 ; v1(75.37,98.49) R10_M1.1@76.14,98.49 ; v1(77.021,104.205) R9_M1.1@77.791,104.205 ; v1(77.021,105.729) C27_M1.1@78.046,105.729 ; D16_M1.1@77.985,66.108 78.037,66.056 v1(78.037,64.708) ; R6_M1.1@79.142,107.507 79.18,107.545 v1(79.18,108.523) ; C29_M1.1@80.442,96.331 80.446,96.335 81.356,96.335 v1(81.359,96.339) 81.359,97.619 C28_M1.1@81.25,97.728 81.339,97.817 U1_M1.8@81.339,99.638 ; C57_M1.2@82.228,81.463 v1(82.228,82.615) ; C13_M1.1@83.371,105.356 C14_M1.1@84.514,105.356 C15_M1.1@85.657,105.356 85.74,105.274 85.74,104.504 v1(85.788,104.455) ; C19_M1.1@84.26,81.463 v1(84.26,82.615) ; C12_M1.1@85.276,110.165 v1(85.276,111.19) ; v1(85.657,64.581) 85.657,66.033 D17_M1.1@85.732,66.108 ; C56_M1.1@86.292,81.463 v1(86.292,82.615) ; v1(86.927,111.19) 86.927,110.419 C10_M1.1@87.181,110.165 ; v1(87.181,103.824) C11_M1.1@87.181,104.976 ; v1(87.816,111.19) 89.318,111.19 C24_M1.1@89.34,111.168 ; C59_M1.2@88.07,81.256 v1(88.07,82.615) ; Q7_M1.2@88.118,68.677 Q7_M1.2@88.768,68.677 ; v1(88.705,67.629) 88.737,67.661 88.737,68.646 Q7_M1.2@88.768,68.677 ; v1(88.832,89.6) 88.865,89.633 89.831,89.633 Q2_M1.2@89.864,89.666 ; D3_M1.1@88.894,95.411 88.925,95.442 v1(90.102,95.442) ; D3_M1.1@88.894,97.251 88.925,97.22 v1(90.102,97.22) ; v1(88.959,50.357) D15_M1.1@88.959,52.005 ; v1(89.34,102.808) C25_M1.1@89.34,103.973 ; Q7_M1.2@89.418,68.677 Q7_M1.2@88.768,68.677 ; C21_M1.1@89.467,80.956 v1(89.467,81.853) ; D19_M1.2@90.032,49.449 90.7,50.116 91.01,50.116 v1(91.059,50.165) ; C22_M1.1@90.737,80.956 v1(90.737,81.853) ; C63_M1.1@91.626,55.191 v1(91.626,54.294) 91.626,54.225 91.753,54.098 U10_M1.4@91.753,53.278 ; v1(92.261,101.157) C9_M1.1@92.261,102.61 ; v1(92.642,48.96) v1@92.753,48.849 ; C65_M1.2@92.753,47.69 92.753,48.78 92.691,48.843 92.691,48.898 92.753,48.96 U10_M1.7@92.753,49.978 ; v1(92.896,54.294) 93.253,53.937 U10_M1.1@93.253,53.278 ; U8_M1.9@93.904,57.339 93.904,56.657 94.293,56.268 v1(94.293,56.199) ; v1(99.835,54.229) C62_M0.1@99.835,55.126 ; v1(100.089,92.71) C26_M0.1@101.953,92.71 ; 100.205,48.814 100.745,49.354 101.183,49.354 v1(101.232,49.403) ; v1(101.74,54.229) 101.74,54.16 101.976,53.924 101.976,53.215 U9_M0.4@101.978,53.213 ; U7_M0.9@102.113,57.274 102.113,56.338 102.375,56.076 v1(102.375,56.007) ; v1(102.248,87.757) C16_M0.1@103.583,87.757 ; v1(102.756,54.229) 102.756,54.16 102.976,53.94 102.976,53.215 U9_M0.2@102.978,53.213 ; C64_M0.2@102.883,47.631 v1(102.883,48.895) ; v1@102.883,48.8 102.978,48.895 U9_M0.7@102.978,49.913 ; v1(103.137,83.312) C18_M0.1@104.298,83.312 ; v1(103.137,85.217) C17_M0.1@104.298,85.217 ; v1(103.264,81.534) C58_M0.1@104.496,81.534 ; v1(103.899,80.137) C20_M0.1@104.796,80.137 ; Q8_M0.2@104.836,68.612 106.136,68.612 106.097,68.573 106.097,67.222 v1(106.058,67.183) ; v1(106.058,50.292) D12_M0.1@106.058,51.94 ; v1(106.566,98.425) R10_M0.1@107.336,98.425 ; v1(108.217,104.14) R9_M0.1@108.987,104.14 ; v1(108.217,105.664) C27_M0.1@109.242,105.664 ; D16_M0.1@109.181,66.043 109.233,65.991 v1(109.233,64.643) ; R6_M0.1@110.338,107.442 110.376,107.48 v1(110.376,108.458) ; C29_M0.1@111.638,96.266 111.641,96.27 112.551,96.27 v1(112.555,96.274) 112.555,97.554 112.446,97.663 112.535,97.752 U1_M0.8@112.535,99.573 ; C57_M0.2@113.424,81.398 v1(113.424,82.55) ; C13_M0.1@114.567,105.291 116.853,105.291 116.935,105.209 116.935,104.439 v1(116.984,104.39) ; C19_M0.1@115.456,81.398 v1(115.456,82.55) ; C11_M0.1@116.472,110.1 v1(116.472,111.125) ; v1(116.853,64.516) 116.853,65.968 D17_M0.1@116.928,66.043 ; C56_M0.1@117.488,81.398 v1(117.488,82.55) ; v1(118.123,111.125) 118.123,110.354 C10_M0.1@118.377,110.1 ; v1(118.377,103.759) C12_M0.1@118.377,104.911 ; v1(119.012,111.125) 120.514,111.125 C24_M0.1@120.536,111.103 ; C59_M0.2@119.266,81.191 v1(119.266,82.55) ; Q7_M0.2@119.314,68.612 Q7_M0.2@119.964,68.612 ; v1(119.901,67.564) 119.932,67.596 119.932,68.581 Q7_M0.2@119.964,68.612 ; v1(120.028,89.535) 120.061,89.568 121.027,89.568 Q2_M0.2@121.06,89.601 ; D3_M0.1@120.09,95.346 120.121,95.377 v1(121.298,95.377) ; D3_M0.1@120.09,97.186 120.121,97.155 v1(121.298,97.155) ; v1(120.155,50.292) D15_M0.1@120.155,51.94 ; v1(120.536,102.743) C25_M0.1@120.536,103.908 ; Q7_M0.2@120.614,68.612 Q7_M0.2@119.964,68.612 ; C21_M0.1@120.663,80.891 v1(120.663,81.788) ; D19_M0.2@121.16,49.266 121.827,49.933 122.138,49.933 v1(122.187,49.982) ; C22_M0.1@121.933,80.891 v1(121.933,81.788) ; C63_M0.1@122.822,55.126 v1(122.822,54.229) 122.822,54.16 122.949,54.033 U10_M0.4@122.949,53.213 ; v1(123.457,101.092) C9_M0.1@123.457,102.545 ; v1(123.838,48.895) v1@123.949,48.784 ; C65_M0.2@123.949,47.625 123.949,48.715 123.886,48.778 123.886,48.833 123.949,48.895 U10_M0.7@123.949,49.913 ; v1(124.092,54.229) 124.449,53.872 U10_M0.1@124.449,53.213 ; U8_M0.9@125.1,57.274 125.1,56.592 125.489,56.203 v1(125.489,56.134) ; v1(128.778,67.818) C33.1@131.086,67.818 ; v1(128.905,80.645) C30.1@131.086,80.645 ; v1(128.905,83.566) C45.1@131.12,83.566 ; v1(129.54,90.297) C78.1@131.12,90.297 ; v1(129.667,86.868) C77.1@131.12,86.868 ; v1(130.556,78.486) C71.1@131.453,78.486 ; v1(131.572,64.643) C35.1@132.469,64.643 ; v1(131.572,65.913) C36.1@132.469,65.913 ; R38.2@132.908,98.806 132.969,98.745 v1(132.969,97.536) ; v1(134.76,104.14) R37.1@135.53,104.14 ; v1(134.76,105.664) C79.1@135.785,105.664 ; R34.1@136.881,107.442 136.919,107.48 v1(136.919,108.458) ; v1(137.16,77.47) 137.16,76.166 I2.1@137.174,76.152 ; C34.1@137.706,66.294 v1(138.938,66.294) ; C37.1@137.913,68.072 v1(139.065,68.072) ; v1(138.938,95.123) 138.938,96.228 C81.2@138.976,96.266 138.938,96.304 138.938,97.612 139.078,97.752 U2.8@139.078,99.573 ; C70.1@139.192,85.081 v1(139.192,86.36) ; C69.1@141.11,105.291 143.396,105.291 143.478,105.209 143.478,104.439 v1(143.527,104.39) ; C46.1@141.605,85.081 v1(141.605,86.36) ; v1(141.859,67.691) C31.1@142.897,67.691 ; C44.1@143.015,110.1 v1(143.015,111.125) ; v1(143.383,64.516) C40.1@144.28,64.516 ; v1(143.383,65.786) C39.1@144.28,65.786 ; C47.1@143.764,85.081 v1(143.764,86.36) ; v1(144.666,111.125) 144.666,110.354 C43.1@144.92,110.1 ; v1(144.92,103.759) C66.1@144.92,104.911 ; v1(145.415,111.506) 145.796,111.125 C76.1@147.057,111.125 ; v1(145.936,90.043) 145.969,90.076 146.935,90.076 Q9.2@146.968,90.109 ; D21.1@146.633,95.346 146.664,95.377 v1(147.841,95.377) ; D21.1@146.633,97.186 146.664,97.155 v1(147.841,97.155) ; v1(147.079,102.743) C75.1@147.079,103.908 ; C32.1@147.806,81.407 v1(148.971,81.407) ; v1(148.844,77.216) 148.844,76.077 I1.1@148.896,76.025 ; C38.1@149.39,66.167 149.644,66.421 v1(150.495,66.421) ; C41.1@149.47,67.945 v1(150.495,67.945) ; v1(150,101.092) C42.1@150,102.545